# Altium PCB 基于单片机的无线红外防盗报警系统.PcbDoc
Units mm, origin at the board's own origin, x right, y up, seen from the top; angles counter-clockwise.
Board outline 134.34 x 60.54 mm, 2 copper layers (Top Layer, Bottom Layer); 21 components, 33 nets, 130 pads, 0 vias.
Unrouted connection lines stored in the file: 8.
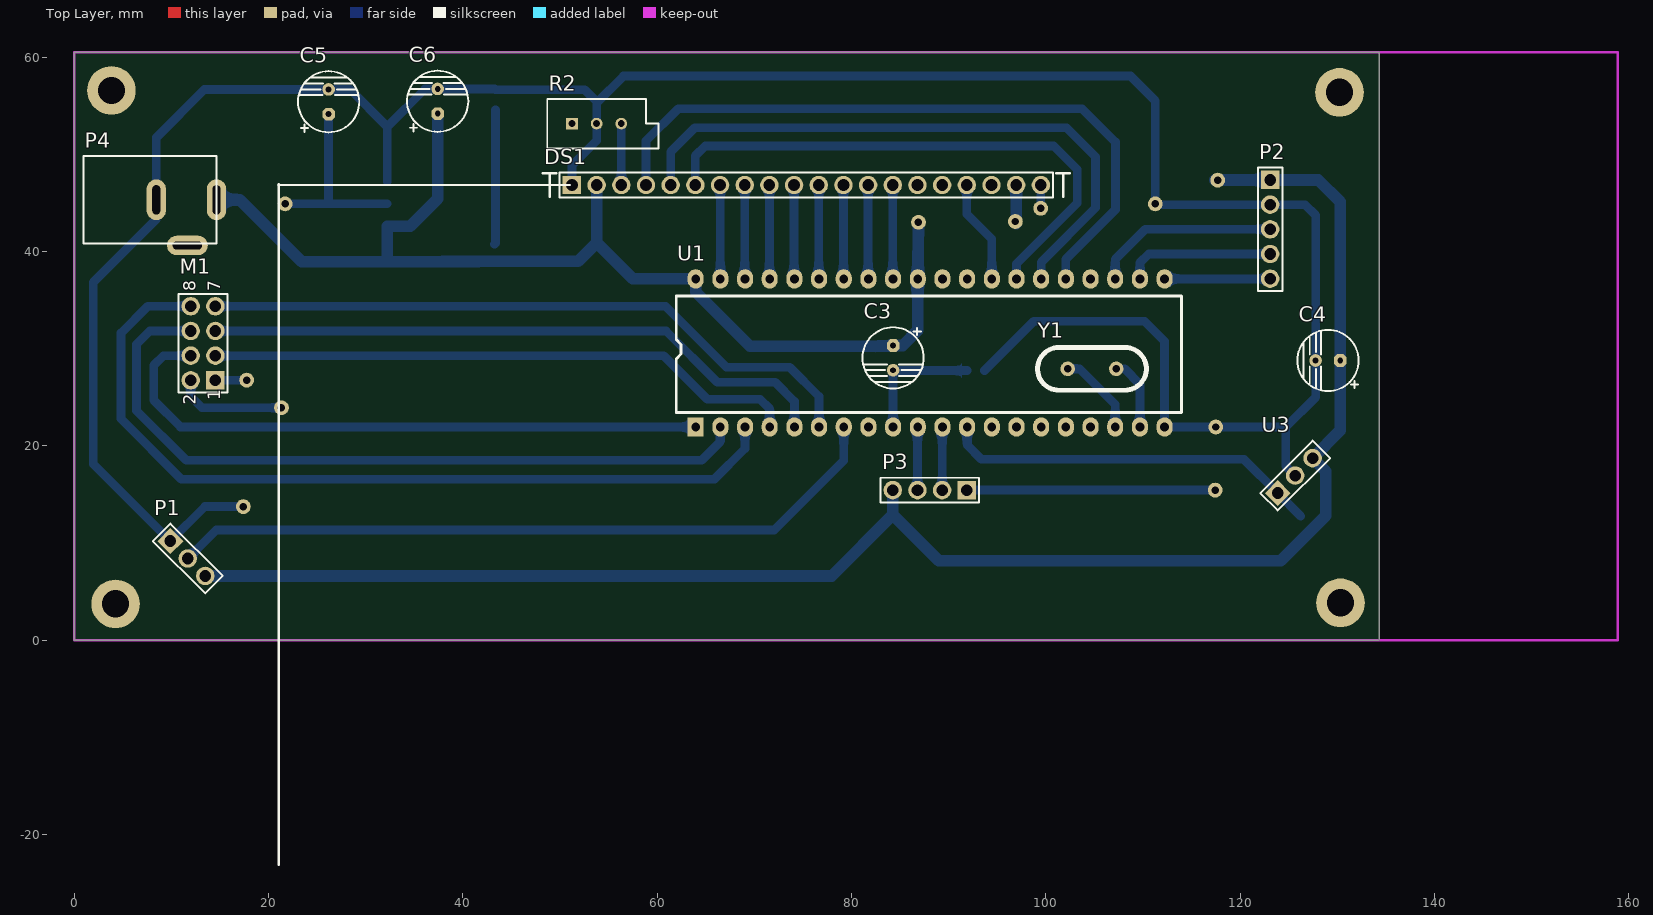
[diagram p0: Top Layer view]
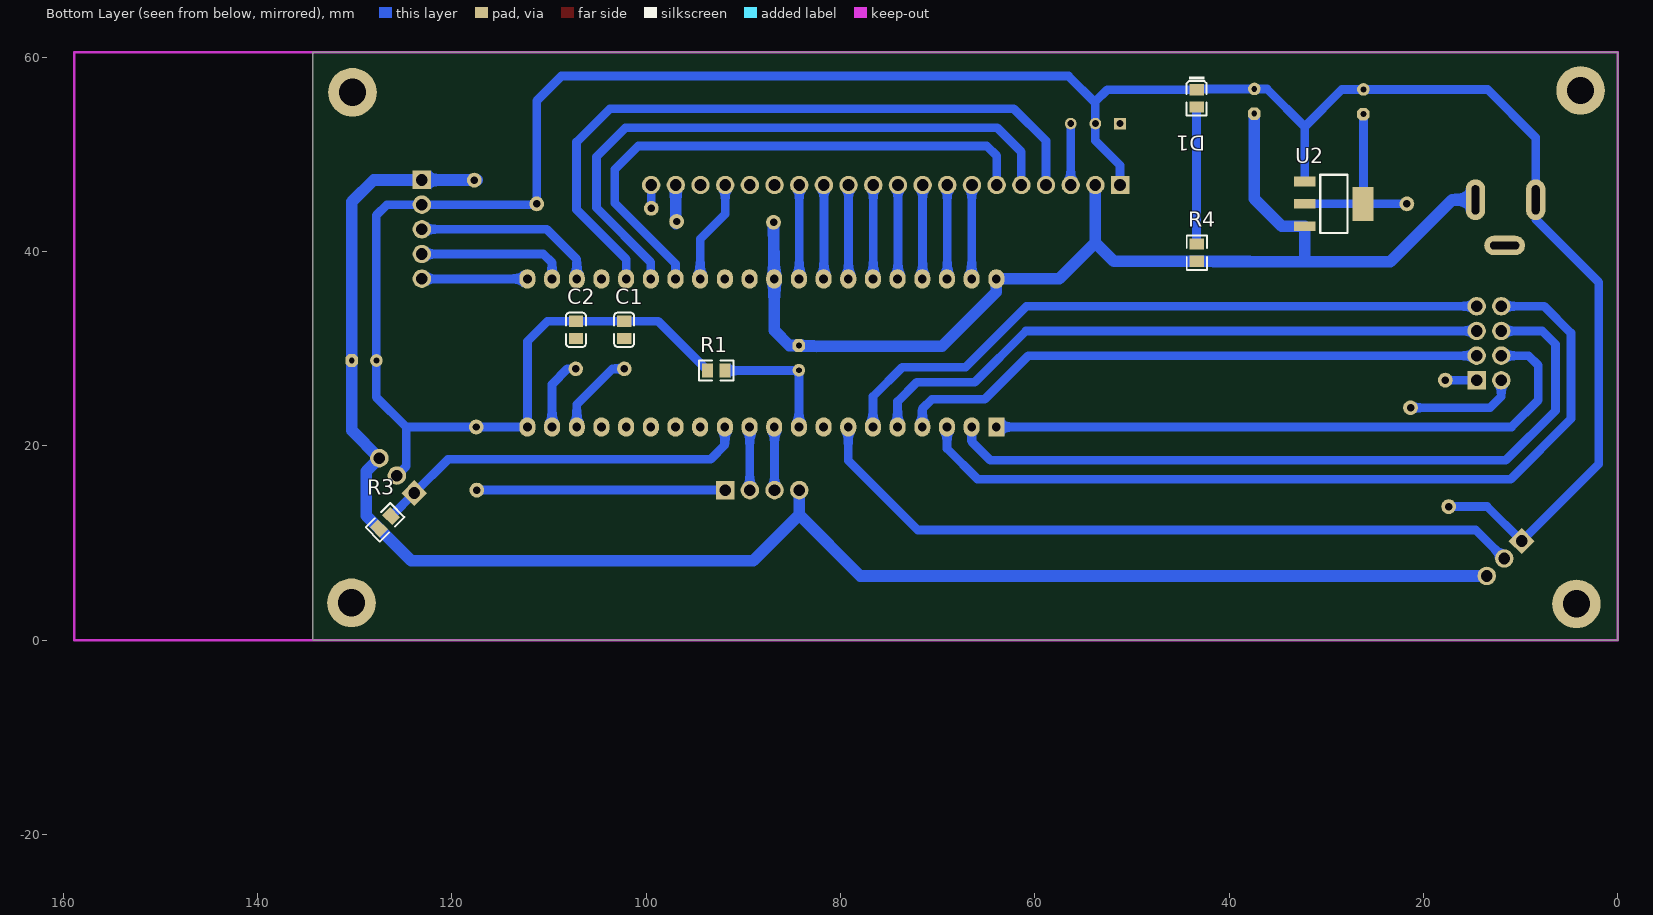
[diagram p1: Bottom Layer view, seen from below]
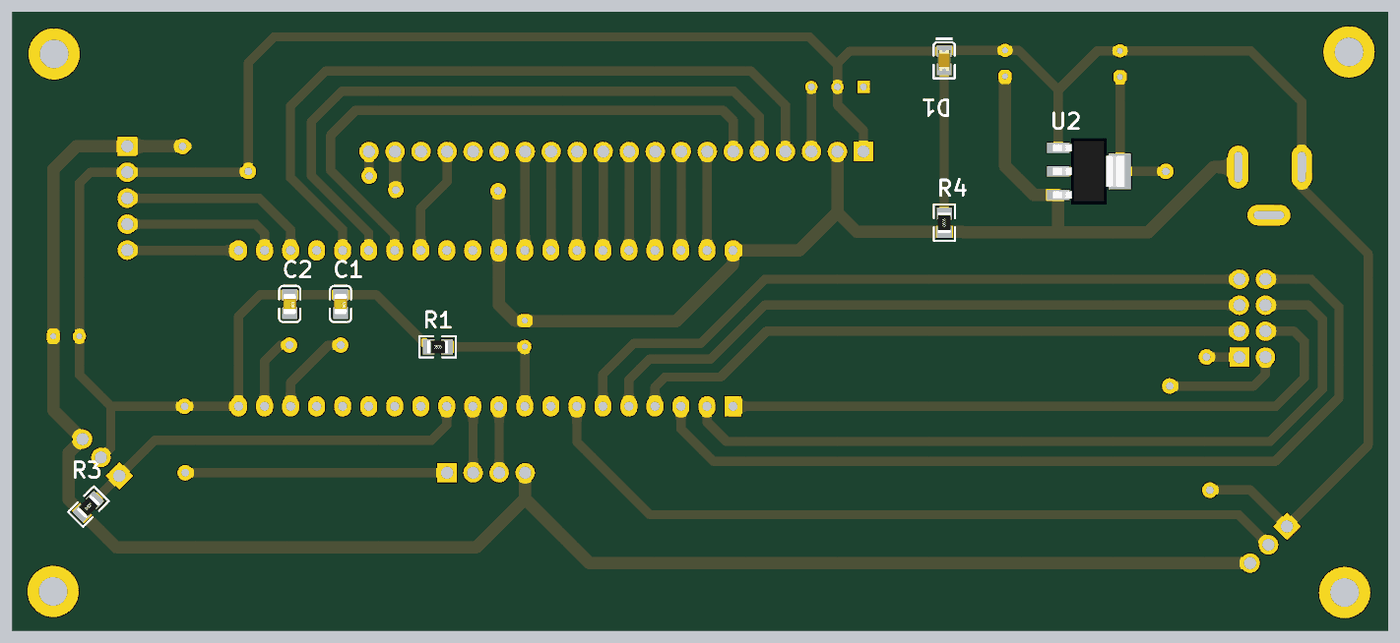
[diagram p2: 3D render of the assembled board from below, using the file's embedded part models]

## Layer stack, top to bottom
Top Solder: solder mask 0.0102, Solder Resist, Dk 3.5
Top Layer: signal copper 0.0356
Dielectric 1: dielectric 0.32, FR-4, Dk 4.8
Bottom Layer: signal copper 0.0356
Bottom Solder: solder mask 0.0102, Solder Resist, Dk 3.5

## Board outline
0,0 0,60.54 134.34,60.54 134.34,0

## Design rules (kind name [scope] priority, off if disabled: settings)
Clearance [All] p1: gap=0.254 ignorepadtopadclearanceinfootprint=FALSE except(0: Arc-Hole Track-Hole SMDPad-Hole THPad-Hole Via-Hole Fill-Hole Poly-Hole Region-Hole Text-Hole)
PolygonConnect [All] p1: connectstyle=Relief reliefconductorwidth=0.254 reliefentries=4 polygonreliefangle="90 Angle" airgapwidth=0.254
RoutingVias [All] p1: holewidth=0.711 width=1.27 viastyle="Through Hole" minholewidth=0.711 minwidth=1.27 maxholewidth=0.711 maxwidth=1.27
SolderMaskExpansion [All] p1: expansion=0.102
Width [InNet('VCC')] p1: maxlimit=1.3 minlimit=1.2 preferedwidth=1.2
Width Width_1 [All] p2: maxlimit=1 minlimit=0.9 preferedwidth=0.9
30 further rules are at their usual default settings.

## Classes and differential pairs
component class 基于单片机的无线红外防盗报警系统: C1 C2 C3 C4 C5 D1 DS1 M1 P1 P2 P3 P4 R1 R2 R3 U1 U2 U3 Y1

## Components (designator, comment, footprint, x,y, rotation, side; value= is the part's Value field where it differs from the comment)
C1 "22pF (220) 5% 50V" LC-0805_C 102.28,31.96 r270 bottom
C2 "22pF (220) 5% 50V" LC-0805_C 107.24,31.96 r270 bottom
C3 "Cap Pol1" RB.2.5/.6.3mm 84.293,29.068 r0 top value=10uF
C4 "Cap Pol1" RB.2.5/.6.3mm 129.05,28.8 r270 top value=10uF
C5 "Cap Pol1" RB.2.5/.6.3mm 26.2,55.43 r180 top value=10uF
C6 "Cap Pol1" RB.2.5/.6.3mm 37.42,55.48 r180 top value=10uF
D1 "红灯 0805" LC-0805_LED_S1 43.36,55.78 r270 bottom
DS1 "LCD-12864" LCD-12864 51.24,46.86 r0 top
M1 "nRF24L01-Module" HDR2X4 14.54,26.76 r90 top
P1 "DS18B20" HDR1X3 9.904,10.216 r315 top
P2 "DS1302" HDR1X5 123.1,47.38 r270 top
P3 "下载口" HDR1X4 91.88,15.46 r180 top
P4 "DC座子" DC插座 14.66,45.34 r0 top
R1 "10KΩ (1002) ±1%" LC-0805_R 92.8,27.76 r180 bottom
R2 "Pot" VR5 53.78,53.18 r0 top value=10K
R3 "10KΩ (1002) ±1%" LC-0805_R 126.89,12.15 r135 bottom
R4 "510Ω (5100) ±1%" LC-0805_R 43.34,39.9 r90 bottom
U1 "STC12C5A60S2" DIP40 63.973,21.956 r90 top
U2 "AMS1117" LC-SOT-223 29.23,44.92 r0 bottom
U3 "红外接收" HDR1X3 123.878,15.158 r45 top
Y1 "XTAL" XTAL 102.26,27.94 r0 top

## Footprints (in the part's own frame and the unit in brackets; to place one, negate y for a bottom-side part, rotate by r counter-clockwise, add the part's x,y. Pads: shape width x height; smd on the part's side, far side on the other; paste and mask are expansions set on the pad)
DC插座 [mm]
  oval 2x4.2 hole 3 slot 0.8 at 0 deg: 1(0,0) 2(-6.2,0)
  oval 4.2x2 hole 3 slot 0.8 at 90 deg: 3(-3,-4.7)
  silkscreen extent -13.7,-4.5 0,4.5
DIP40 [mm]
  rect 2x1.65 hole 0.9: 1(0,0)
  oval 2x1.65 hole 0.9: 2(0,-2.54) 3(0,-5.08) 4(0,-7.62) 5(0,-10.16) 6(0,-12.7) 7(0,-15.24) 8(0,-17.78) 9(0,-20.32) 10(0,-22.86) 11(0,-25.4) 12(0,-27.94) 13(0,-30.48) 14(0,-33.02) 15(0,-35.56) 16(0,-38.1) 17(0,-40.64) 18(0,-43.18) 19(0,-45.72) 20(0,-48.26) 21(15.24,-48.26) 22(15.24,-45.72) 23(15.24,-43.18) 24(15.24,-40.64) 25(15.24,-38.1) 26(15.24,-35.56) 27(15.24,-33.02) 28(15.24,-30.48) 29(15.24,-27.94) 30(15.24,-25.4) 31(15.24,-22.86) 32(15.24,-20.32) 33(15.24,-17.78) 34(15.24,-15.24) 35(15.24,-12.7) 36(15.24,-10.16) 37(15.24,-7.62) 38(15.24,-5.08) 39(15.24,-2.54) 40(15.24,0)
  silkscreen extent 1.5,-50 13.5,2
HDR1X3 [mm] "Connector; Header; 3 Position"
  rect 1.9x1.9 hole 1.2: 1(0,0)
  round 1.9 hole 1.2: 2(2.54,0) 3(5.08,0)
  silkscreen extent -1.27,-1.27 6.35,1.27
HDR1X4 [mm] "Connector; Header; 4 Position"
  rect 1.9x1.9 hole 1.2: 1(0,0)
  round 1.9 hole 1.2: 2(2.54,0) 3(5.08,0) 4(7.62,0)
  silkscreen extent -1.27,-1.27 8.89,1.27
HDR1X5 [mm] "Connector; Header; 5 Position"
  rect 1.9x1.9 hole 1.2: 1(0,0)
  round 1.9 hole 1.2: 2(2.54,0) 3(5.08,0) 4(7.62,0) 5(10.16,0)
  silkscreen extent -1.27,-1.27 11.43,1.27
HDR2X4 [mm] "Connector; Header; 4x2 Position"
  rect 1.9x1.9 hole 1.2: 1(0,0)
  round 1.9 hole 1.2: 2(0,2.54) 3(2.54,0) 4(2.54,2.54) 5(5.08,0) 6(5.08,2.54) 7(7.62,0) 8(7.62,2.54)
  silkscreen extent -1.27,-1.27 8.89,3.81
LC-0805_C [mm]
  rect 1.16x1.47 smd: 1(-0.89,0) 2(0.89,0)
  silkscreen extent -1.77,-1.04 1.77,1.04, body extent -1,-0.63 1,0.62, height 0.77
LC-0805_LED_S1 [mm]
  rect 1.16x1.47 smd: A(0.89,0) K(-0.89,0)
  silkscreen extent -2.24,-1.04 1.77,1.03, body extent -1.01,-0.63 1.01,0.62, height 1.1
LC-0805_R [mm]
  rect 1.16x1.47 smd: 1(-0.89,0) 2(0.89,0)
  silkscreen extent -1.77,-1.04 1.77,1.03, body extent -1,-0.63 1,0.62, height 0.49
LC-SOT-223 [mm]
  rect 2.2x1 smd: 1(3,-2.3) 2(3,0) 3(3,2.3)
  rect 2.2x3.5 smd: 2(-3,0)
  silkscreen extent -1.4,-3 1.4,3, body extent -3.49,-3.24 3.49,3.24, height 1.64
LCD-12864 [mm]
  rect 1.9x1.9 hole 1.2: 1(0,0)
  round 1.9 hole 1.2: 2(2.54,0) 3(5.08,0) 4(7.62,0) 5(10.16,0) 6(12.7,0) 7(15.24,0) 8(17.78,0) 9(20.32,0) 10(22.86,0) 11(25.4,0) 12(27.94,0) 13(30.48,0) 14(33.02,0) 15(35.56,0) 16(38.1,0) 17(40.64,0) 18(43.18,0) 19(45.72,0) 20(48.26,0)
  silkscreen extent -3,-1.27 51.26,1.27
RB.2.5/.6.3mm [mm]
  oct 1.3x1.3 hole 0.6: 1(0,1.27)
  round 1.3 hole 0.6: 2(0,-1.27)
  silkscreen extent -3.15,-3.15 3.15,3.15
VR5 [mm] "Thru-Hole; 3 Leads"
  rect 1.2x1.2 hole 0.7: 1(-2.54,0)
  round 1.2 hole 0.7: 2(0,0) 3(2.54,0)
  silkscreen extent -5.08,-2.54 6.35,2.54
XTAL [mm]
  round 1.5 hole 0.8: 1(0,0) 2(5,0)
  silkscreen extent -3.1,-2.2 8.1,2.2

## Part data
C1 C2: library part "0805 22pF (220) 5% 50V", "贴片电容", Package=0805, SuppliersPartNumber=C1804, ComponentLink1Description=¹©Ó, ComponentLink1URL=http://www.szlcsc.com/product/details_2156.html, Supplier=LC
C3 C4 C5 C6: "Polarized Capacitor (Radial)", LatestRevisionDate=17-Jul-2002, LatestRevisionNote="Re-released for DXP Platform.", PackageDescription="Polarized Capacitor (Radial); 2 Leads", PackageReference=RB7.6-15, Published=8-Jun-2000, Publisher="Altium Limited"
D1: library part "0805 红灯", "发光二极管"
DS1: "带//不带字库"
P1 P4: library part "Header 3", "Header, 3-Pin", LatestRevisionDate=17-Jul-2002, LatestRevisionNote="Re-released for DXP Platform.", Publisher="Altium Limited"
P2: library part "Header 5", "Header, 5-Pin", LatestRevisionDate=17-Jul-2002, LatestRevisionNote="Re-released for DXP Platform.", Publisher="Altium Limited"
P3: library part "Header 4", "Header, 4-Pin", LatestRevisionDate=17-Jul-2002, LatestRevisionNote="Re-released for DXP Platform.", Publisher="Altium Limited"
R1 R3: library part "0805 10KΩ (1002) 1%", "贴片电阻", Package=0805, SuppliersPartNumber=C17414, ComponentLink1Description=¹©Ó, ComponentLink1URL=http://www.szlcsc.com/product/details_18102.html, Supplier=LC
R2: library part RPot, "Potentiometer", LatestRevisionDate=17-Jul-2002, LatestRevisionNote="Re-released for DXP Platform.", PackageDescription="Variable Resistor, Thru-Hole; 3 Leads", PackageReference=VR5, Published=8-Jun-2000, Publisher="Altium Limited", Set Position=0.5, Sim Note="Enter the Resistance value and the set point into parameter fields."
R4: library part "0805 510Ω (5100) 1%", "贴片电阻", Package=0805, SuppliersPartNumber=C17734, ComponentLink1Description=¹©Ó, ComponentLink1URL=http://www.szlcsc.com/product/details_18422.html, Supplier=LC
U1: library part AT89C52, "8-Bit Microcontroller with 8K Flash ROM"
U3: "VS838"
Y1: "Crystal Oscillator", LatestRevisionDate=17-Jul-2002, LatestRevisionNote="Re-released for DXP Platform.", PackageDescription="Crystal, Thru-Hole; 2 Leads; Body 3.1 x 8.2 mm (Dia.xH)", PackageReference=R38, Published=8-Jun-2000, Publisher="Altium Limited"

## Free pads (board coordinates)
  round 5 hole 2.8: 0(3.84,56.6) 0(4.272,3.753) 0(130.24,56.4) 0(130.34,3.86)
  round 1.524 hole 0.762: 2(86.9,43.02) 2(96.88,43.1) 2(99.48,44.46) 2(117.7,47.36) 5(17.42,13.76) 5(17.76,26.78) 5(111.28,44.92) 6(21.34,23.94) 7(21.72,44.92) 8(117.44,15.46) 8(117.504,21.956)

## Nets (pads, with @x,y where several pads share a name; then routed paths per layer and width w, separated by ;. In a path a pad name is that pad's centre, name@x,y a point inside that pad or via, vN(x,y) a via of type N, cw(c..) or ccw(c..) an arc to the next point about the centre after c; other vN are vias at no path point)
DB0: DS1.7 U1.39 | length 9.7
  Bottom Layer w0.9: DS1.7 66.513,46.827 U1.39
DB1: DS1.8 U1.38 | length 9.7
  Bottom Layer w0.9: DS1.8 69.02,37.229 U1.38
DB2: DS1.9 U1.37 | length 9.7
  Bottom Layer w0.9: DS1.9 71.56,37.229 U1.37
DB3: DS1.10 U1.36 | length 9.7
  Bottom Layer w0.9: DS1.10 74.1,37.229 U1.36
DB4: DS1.11 U1.35 | length 9.7
  Bottom Layer w0.9: DS1.11 76.64,37.229 U1.35
DB5: DS1.12 U1.34 | length 9.7
  Bottom Layer w0.9: DS1.12 79.18,37.229 U1.34
DB6: DS1.13 U1.33 | length 9.7
  Bottom Layer w0.9: DS1.13 81.72,37.229 U1.33
DB7: DS1.14 U1.32 | length 9.7
  Bottom Layer w0.9: DS1.14 84.26,37.229 U1.32
DS18B20_DQ: P1.2 U1.7 | length 75.1
  Bottom Layer w0.9: P1.2 14.64,11.36 72.06,11.36 79.213,18.513 U1.7
DS1302_CLK: P2.3 U1.23 | length 19.2
  Bottom Layer w0.9: U1.23 107.153,39.213 110.24,42.3 P2.3
DS1302_DAT: P2.4 U1.22 | length 15.4
  Bottom Layer w0.9: U1.22 109.693,38.853 110.6,39.76 P2.4
DS1302_RST: P2.5 U1.21 | length 10.9
  Bottom Layer w0.9: U1.21 123.076,37.196 P2.5
GND: C1.1 C2.1 C4.2 C5.2 C6.2 D1.K DS1.1 DS1.20 M1.1 P1.1 P2.2 P3.1 P4.2 pad.2@99.48,44.46 pad.5 pad.8 R1.1 R2.2 U1.20 U2.1 U3.2 | length 312.7
  Bottom Layer w0: pad.5@111.28,44.92 pad.5@111.36,44.84
  Bottom Layer w0.9: M1.1 17.74,26.76 pad.5@17.76,26.78 ; pad.5@17.42,13.76 17.4,13.78 13.468,13.78 P1.1 1.98,18.14 1.98,36.84 8.46,43.32 P4.2 8.46,51.74 13.42,56.7 C5.2 28.4,56.7 32.23,52.87 ; U2.1 32.23,52.87 ; C6.2@37.42,56.73 43.3,56.73 D1.K 52.57,56.67 53.78,55.46 53.78,55.31 ; C6.2 36.11,56.75 32.23,52.87 ; DS1.1 51.24,48.9 53.78,51.44 R2.2 53.78,55.31 ; P3.1 pad.8@117.44,15.46 ; R1.1 98.78,32.85 C1.1 C2.1 110.17,32.85 112.233,30.787 U1.20 117.504,21.956 124.706,21.956 ; pad.2@99.5,44.36 DS1.20 ; pad.5@111.28,44.92 111.28,55.53 108.74,58.07 56.54,58.07 53.78,55.31 ; pad.5@111.36,44.84 P2.2 126.69,44.84 127.78,43.75 C4.2 127.78,25.03 124.706,21.956 ; U3.2 124.706,17.922 124.706,21.956
LCD12864_E: DS1.6 U1.27 | length 57.6
  Bottom Layer w0.9: DS1.6 63.94,49.86 64.96,50.88 100.82,50.88 103.24,48.46 103.24,45 96.993,38.753 U1.27
LCD12864_R/W: DS1.5 U1.26 | length 64.3
  Bottom Layer w0.9: DS1.5 61.4,50.28 63.88,52.76 102.14,52.76 105.13,49.77 105.13,44.51 99.533,38.913 U1.26
LCD12864_RS: DS1.4 U1.25 | length 71.9
  Bottom Layer w0.9: DS1.4 58.86,51.4 62.18,54.72 103.74,54.72 107.17,51.29 107.17,44.31 102.073,39.213 U1.25
LCD12864_RST: DS1.17 U1.28 | length 10.7
  Bottom Layer w0.9: DS1.17 91.88,43.88 94.453,41.307 U1.28
NetD1_A: D1.A R4.2 | length 13.9
  Bottom Layer w0.9: R4.2@43.26,40.77 43.36,40.87 D1.A@43.36,54.6
NetDS1_3: DS1.3 R2.3 | length 6.4
  Bottom Layer w0.9: R2.3@56.24,53.26 R2.3 DS1.3
NRF24L01_CE: M1.3 U1.4 | length 61.2
  Bottom Layer w0.9: M1.3 60.7,29.3 65.18,24.82 70.6,24.82 71.593,23.827 U1.4
NRF24L01_CSN: M1.4 U1.1 | length 64.7
  Bottom Layer w0.9: M1.4 9.2,29.3 8.2,28.3 8.2,24.72 10.964,21.956 U1.1
NRF24L01_IRQ: M1.8 U1.3 | length 87.5
  Bottom Layer w0.9: M1.8 7.58,34.38 4.82,31.62 4.82,22.8 11.04,16.58 65.9,16.58 69.053,19.733 U1.3
NRF24L01_MISI: M1.6 U1.2 | length 77.5
  Bottom Layer w0.9: M1.6 7.78,31.84 6.42,30.48 6.42,23.64 11.54,18.52 64.6,18.52 66.513,20.433 U1.2
NRF24L01_MISO: M1.7 U1.6 | length 69.1
  Bottom Layer w0.9: M1.7 60.86,34.38 67.14,28.1 73.66,28.1 76.673,25.087 U1.6
NRF24L01_SCK: M1.5 U1.5 | length 65.2
  Bottom Layer w0.9: M1.5 60.92,31.84 66.2,26.56 72.16,26.56 74.133,24.587 U1.5
NRF24L01_VCC3.3: C5.1 M1.2 pad.6 pad.7 U2.2 | length 31.2
  Bottom Layer w0.9: M1.2 12,25.1 13.16,23.94 pad.6 ; pad.7 U2.2@26.23,44.92 ; C5.1@26.19,54.14 26.19,44.96 U2.2@26.23,44.92 ; U2.2@32.23,44.92 U2.2@26.23,44.92
RST: C3.2 R1.2 U1.9 | length 13.5
  Bottom Layer w0.9: U1.9 C3.2 84.331,27.76 R1.2
RXD1: P3.3 U1.10 | length 6.5
  Bottom Layer w0.9: P3.3 86.8,21.923 U1.10
TXD1: P3.2 U1.11 | length 6.5
  Bottom Layer w0.9: P3.2 89.34,21.923 U1.11
VCC: C3.1 C4.1 C6.1 DS1.2 DS1.19 P1.3 P2.1 P3.4 P4.1 pad.2@86.9,43.02 pad.2@96.88,43.1 pad.2@117.7,47.36 R3.1 R4.1 U1.31 U1.40 U2.3 U3.3 | length 293.5
  Bottom Layer w1.2: P1.3 77.964,6.624 84.26,12.92 ; P4.1 17.06,45.34 23.44,38.96 32.22,38.96 ; C6.1 37.42,45.46 34.58,42.62 U2.3 32.23,38.97 32.22,38.96 ; DS1.2 53.78,40.92 ; P3.4 84.26,12.92 ; pad.2@86.9,43.02 U1.31 86.833,31.893 85.278,30.338 C3.1 84.215,30.26 69.56,30.26 63.973,35.847 U1.40 57.504,37.196 53.78,40.92 ; pad.2@96.96,42.9 DS1.19 ; pad.2@117.42,47.38 P2.1 128.06,47.38 130.32,45.12 C4.1 130.32,21.6 U3.3 128.82,17.4 128.82,12.821 R3.1 124.189,8.19 88.99,8.19 84.26,12.92 ; 32.22,38.96 37.92,38.96 37.95,38.99 41.61,38.99 41.63,39.01 R4.1 51.87,39.01 53.78,40.92
VVS183B_OUT: R3.2 U1.12 U3.1 | length 39.2
  Bottom Layer w0.9: U1.12 91.913,20.107 93.38,18.64 120.396,18.64 U3.1 126.256,12.779 R3.2
X1: C2.2 U1.19 Y1.2 | length 7.5
  Bottom Layer w0.9: Y1.2 108.12,27.94 109.693,26.367 U1.19
X2: C1.2 U1.18 Y1.1 | length 8.7
  Bottom Layer w0.9: Y1.1@102.27,27.95 Y1.1 103.48,27.94 107.153,24.267 U1.18
pads on no net: DS1.15 DS1.16 DS1.18 P4.3 R2.1 U1.8 U1.13 U1.14 U1.15 U1.16 U1.17 U1.24 U1.29 U1.30

## Keep-outs
Keep-Out Layer:
  lines w0.254: 0,0 158.89,0 158.89,60.54 0,60.54 0,0

## Silkscreen, mask and mechanical layers (free items; w line width, h text height)
Top Overlay:
  lines w0.254: 21,46.86 51,46.86 ; 21.04,-23.08 21.04,46.92

## Text inside footprints (layer, text, board x,y; h text height)
M1: Top Overlay "8" at 12.508,35.904 h1.27 r90; Top Overlay "7" at 15.048,35.904 h1.27 r90; Top Overlay "1" at 15.048,24.728 h1.27 r90; Top Overlay "2" at 12.508,24.22 h1.27 r90